# EAGLE board module_template_core.brd.LOCAL (EAGLE 5.09)

Size 100 x 75 mm. Coordinates in mm from the lower left corner, seen from the top.
Outline: 0,0 100,0 100,75 0,75 0,0
Copper layers (1*16): Top 0.035mm / dielectric 1.5mm / Bottom 0.035mm
Design rules "default": minimum track width 10mil, minimum drill 24mil, track to track 8mil, track to pad 8mil, pad to pad 8mil, via to via 8mil, smd to smd 8mil, copper to edge 40mil, drill to drill 8mil, minimum pad ring 10mil, minimum via ring 8mil, stop-mask expansion 4mil, vias tented up to drill 0mil, thermal gap 10mil
Net classes: 0 Signal: width 0.305 mm, drill 0.508 mm, clearance 0.203 mm; 1 LoVolt42: width 0.61 mm, drill 0.508 mm, clearance 0.813 mm to class 0, clearance 0.305 mm; 2 MedVolt100: width 0.61 mm, drill 0.508 mm, clearance 1.626 mm to class 0, clearance 1.626 mm to class 1, clearance 0.813 mm; 3 LineVolt350: width 0.813 mm, drill 0.508 mm, clearance 12.7 mm to class 0, clearance 12.7 mm to class 1, clearance 12.7 mm to class 2, clearance 2.54 mm

## Footprints (pad centres in the part's own frame; a part is rotated, then mirrored left to right if it is on the bottom)
ML64L = drill 0.914 pad 1.6 offset: 1 -39.37,-1.27; 2 -39.37,1.27; 3 -36.83,-1.27; 4 -36.83,1.27; 5 -34.29,-1.27; 6 -34.29,1.27; 7 -31.75,-1.27; 8 -31.75,1.27; 9 -29.21,-1.27; 10 -29.21,1.27; 11 -26.67,-1.27; 12 -26.67,1.27; 13 -24.13,-1.27; 14 -24.13,1.27; 15 -21.59,-1.27; 16 -21.59,1.27; 17 -19.05,-1.27; 18 -19.05,1.27; 19 -16.51,-1.27; 20 -16.51,1.27; 21 -13.97,-1.27; 22 -13.97,1.27; 23 -11.43,-1.27; 24 -11.43,1.27; 25 -8.89,-1.27; 26 -8.89,1.27; 27 -6.35,-1.27; 28 -6.35,1.27; 29 -3.81,-1.27; 30 -3.81,1.27; 31 -1.27,-1.27; 32 -1.27,1.27; 33 1.27,-1.27; 34 1.27,1.27; 35 3.81,-1.27; 36 3.81,1.27; 37 6.35,-1.27; 38 6.35,1.27; 39 8.89,-1.27; 40 8.89,1.27; 41 11.43,-1.27; 42 11.43,1.27; 43 13.97,-1.27; 44 13.97,1.27; 45 16.51,-1.27; 46 16.51,1.27; 47 19.05,-1.27; 48 19.05,1.27; 49 21.59,-1.27; 50 21.59,1.27; 51 24.13,-1.27; 52 24.13,1.27; 53 26.67,-1.27; 54 26.67,1.27; 55 29.21,-1.27; 56 29.21,1.27; 57 31.75,-1.27; 58 31.75,1.27; 59 34.29,-1.27; 60 34.29,1.27; 61 36.83,-1.27; 62 36.83,1.27; 63 39.37,-1.27; 64 39.37,1.27
ML34L = drill 0.914 offset: 1 -20.32,-1.27; 2 -20.32,1.27; 3 -17.78,-1.27; 4 -17.78,1.27; 5 -15.24,-1.27; 6 -15.24,1.27; 7 -12.7,-1.27; 8 -12.7,1.27; 9 -10.16,-1.27; 10 -10.16,1.27; 11 -7.62,-1.27; 12 -7.62,1.27; 13 -5.08,-1.27; 14 -5.08,1.27; 15 -2.54,-1.27; 16 -2.54,1.27; 17 0,-1.27; 18 0,1.27; 19 2.54,-1.27; 20 2.54,1.27; 21 5.08,-1.27; 22 5.08,1.27; 23 7.62,-1.27; 24 7.62,1.27; 25 10.16,-1.27; 26 10.16,1.27; 27 12.7,-1.27; 28 12.7,1.27; 29 15.24,-1.27; 30 15.24,1.27; 31 17.78,-1.27; 32 17.78,1.27; 33 20.32,-1.27; 34 20.32,1.27
3,2 = hole 3.2: 0,0

## Placement (x,y rotation side)
SV1  [ML64L]  49.53,69.85 0 top
SV2  [ML34L]  95.25,35.56 270 top
U$1  [3,2]  4,4 0 top
U$2  [3,2]  4,67 0 top
U$3  [3,2]  96,67 0 top
U$4  [3,2]  96.19,4 0 top

## Library data of the parts
SV1 SV2 = con-ml
U$1-U$4 = holes

## Nets
+5V: SV1.2 SV1.64
A0: SV1.11
A1: SV1.12
A2: SV1.13
A3: SV1.14
A4: SV1.15
A5: SV1.16
A6: SV1.17
A7: SV1.18
A8: SV1.19
A9: SV1.20
A10: SV1.21
A11: SV1.22
A12: SV1.23
A13: SV1.24
A14: SV1.25
A15: SV1.26
BOOT: SV1.62
D0: SV1.3
D1: SV1.4
D2: SV1.5
D3: SV1.6
D4: SV1.7
D5: SV1.8
D6: SV1.9
D7: SV1.10
GND: SV1.1 SV1.63
HALT: SV1.56
INT: SV1.51
IVR: SV1.52
MME: SV1.53
NC_0: SV1.27
NC_1: SV1.28
NC_2: SV1.29
NC_3: SV1.30
NC_4: SV1.31
NC_5: SV1.32
NC_6: SV1.33
NC_7: SV1.34
NC_8: SV1.35
NC_9: SV1.36
NC_10: SV1.37
NC_11: SV1.38
NC_12: SV1.39
NC_13: SV1.40
NC_14: SV1.41
NC_15: SV1.42
NC_16: SV1.43
NC_17: SV1.44
NC_18: SV1.45
NC_19: SV1.46
NC_20: SV1.47
NC_21: SV1.48
NC_22: SV1.49
NC_23: SV1.50
RESET: SV1.61
SYSCK: SV1.55
SYSCK_DE: SV1.58
SYSCK_EX: SV1.59
SYSCK_FE: SV1.57
SYSCK_WB: SV1.60
WRITE: SV1.54

## Tracks (layer width: path | path; a pad name or v marks a point on that pad's centre or on a via)
+5V  (1 unrouted)
GND  (1 unrouted)